# Altium PCB Banker_EDGE_2_SMA.PCBDOC
Units mm, origin at the board's own origin, x right, y up, seen from the top; angles counter-clockwise.
Board outline 21.4 x 72.8 mm, 2 copper layers (Top, Bot), stack 1.571 mm thick; 22 components, 25 nets, 96 pads, 71 vias.
Unrouted connection lines stored in the file: 1.
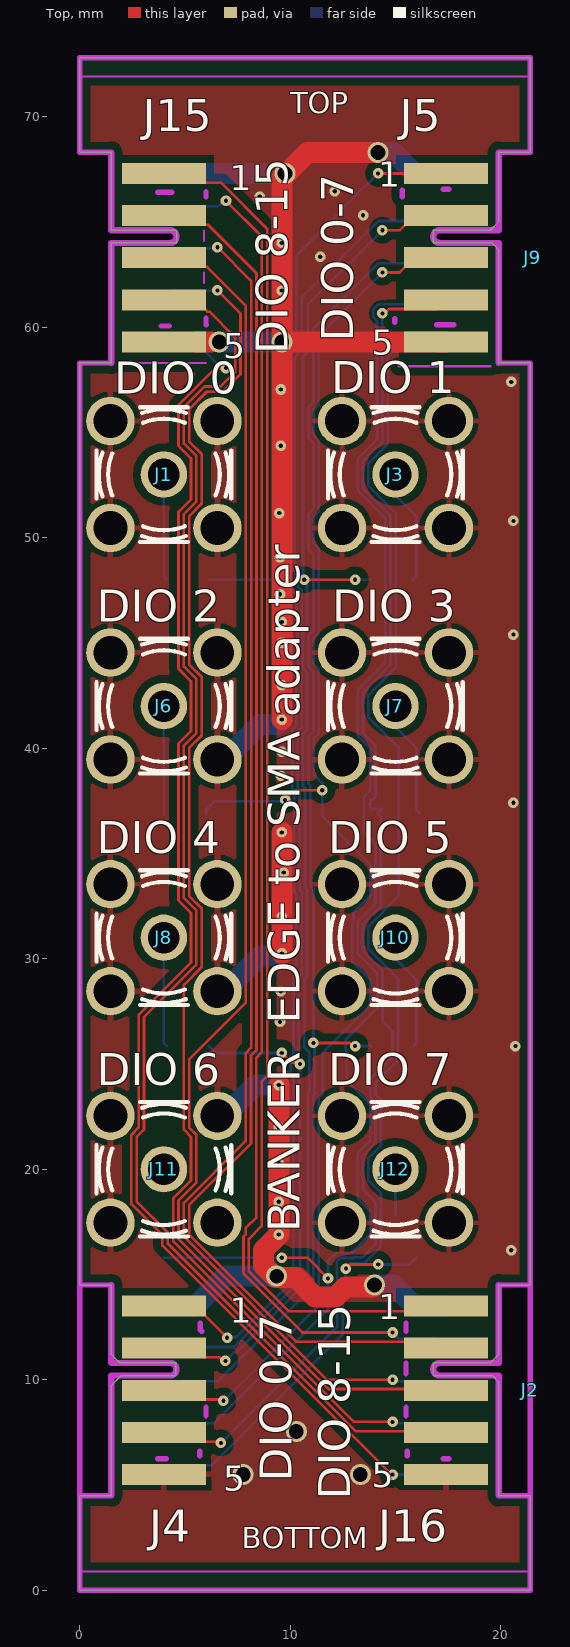
[diagram p0: Top view]
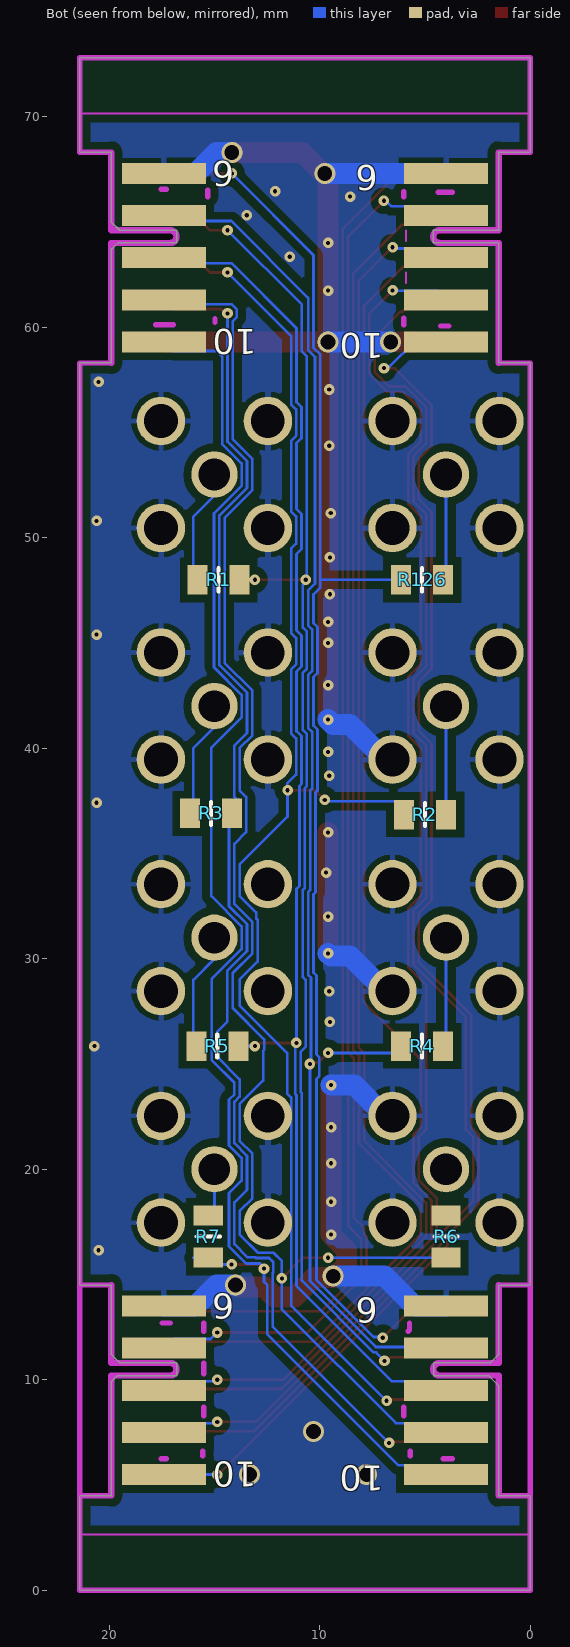
[diagram p1: Bot view, seen from below]
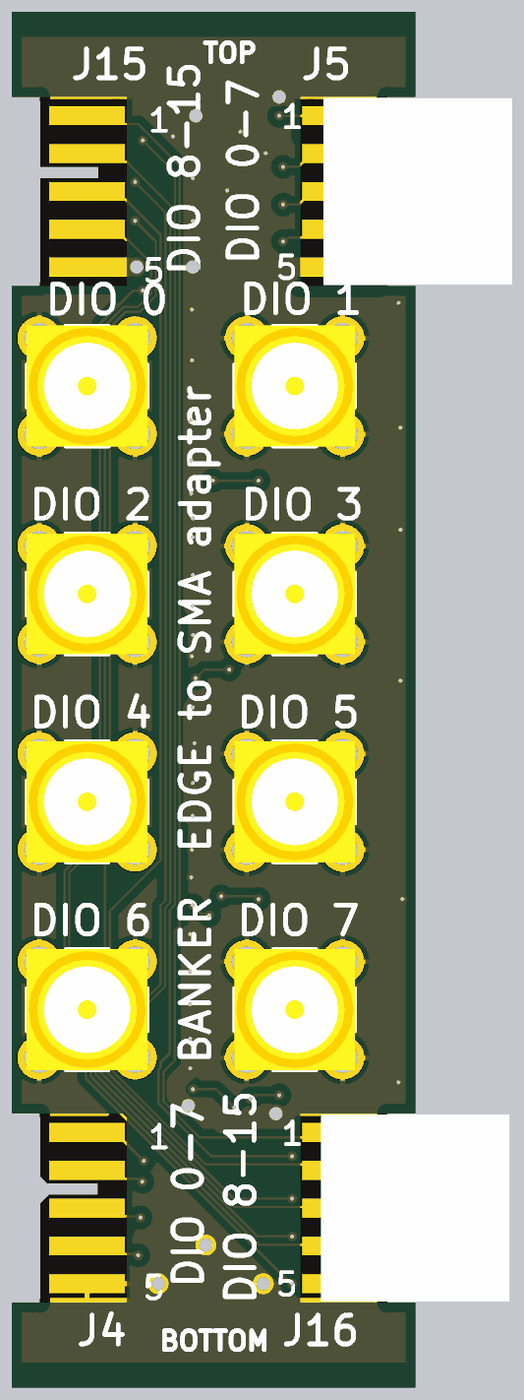
[diagram p2: 3D render of the assembled board from above, using the file's embedded part models]
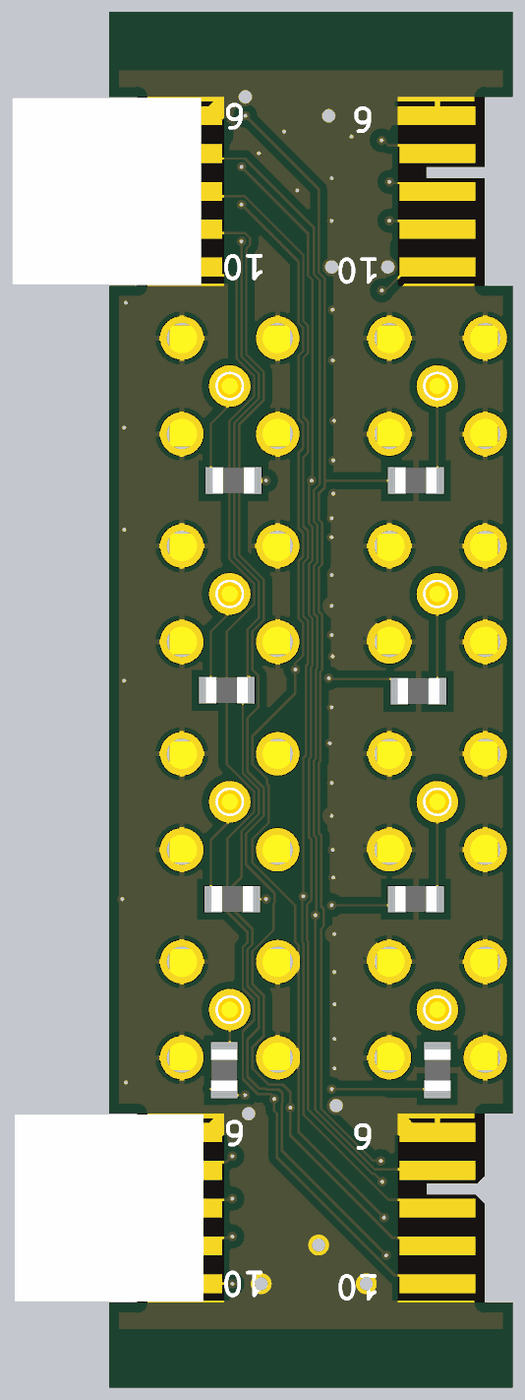
[diagram p3: 3D render of the assembled board from below, using the file's embedded part models]

## Layer stack, top to bottom
TopSolder: solder mask 0.0102, Solder Resist, Dk 3.5
Top: signal copper 0.0356
Dielectric1: core 1.5, FR-4, Dk 4.8
Bot: signal copper 0.0356
BottomSolder: solder mask 0.0102, Solder Resist, Dk 3.5

## Board outline
0,0 0,4.5 1.5,4.5 1.5,9.725 1.975,10.2 4.572,10.2 4.572,10.8 1.9,10.8 1.5,11.2 1.5,14.5 0,14.5 0,58.3 1.5,58.3 1.5,64 4.6,64 4.6,64.6 1.5,64.6 1.5,68.3 0,68.3 0,72.8 21.4,72.8 21.4,68.3 19.9,68.3 19.9,65 19.5,64.6 16.8,64.6 16.8,64 19.6,64 19.8,63.8 19.9,63.7 19.9,58.3 21.4,58.3 21.4,14.5 19.9,14.5 19.9,11.2 19.5,10.8 16.8,10.8 16.8,10.2 19.6,10.2 19.9,9.9 19.9,4.5 21.4,4.5 21.4,0

## Design rules (kind name [scope] priority, off if disabled: settings)
Clearance Clearance_DIFF [(InDifferentialPairClass('All Differential Pairs'))] p1: gap=0.127 ignorepadtopadclearanceinfootprint=FALSE except(0: Arc-Hole Track-Hole SMDPad-Hole THPad-Hole Via-Hole Fill-Hole Poly-Hole Region-Hole Text-Hole; 0.254: Arc-Poly Track-Poly SMDPad-Poly THPad-Poly Via-Poly Fill-Poly Poly-Poly Poly-Region Poly-Text)
Clearance [All] p2: gap=0.127 ignorepadtopadclearanceinfootprint=FALSE except(0: Arc-Hole Track-Hole SMDPad-Hole THPad-Hole Via-Hole Fill-Hole Poly-Hole Region-Hole Text-Hole; 0.381: Arc-Poly Track-Poly SMDPad-Poly THPad-Poly Via-Poly Fill-Poly Poly-Poly)
DiffPairsRouting [All] p1: maxlimit=0.254 minlimit=0.127 mostfreqgap=0.127 toplayer_minwidth=0.127 toplayer_maxwidth=0.381 toplayer_prefwidth=0.254 bottomlayer_minwidth=0.127 bottomlayer_maxwidth=0.381 bottomlayer_prefwidth=0.254 maxuncoupledlength=12.7
FabricationTestPointUsage TestPointUsage [All] p1: valid=0 allowmultiple=FALSE
FabricationTestpoint Testpoint [All] p1: side=3 testpointundercomponent=TRUE minsize=1.016 maxsize=2.54 preferedsize=1.524 minholesize=0.508 maxholesize=1.016 preferedholesize=0.813 testpointgrid=0.025 allowsidetop=TRUE allowsidebottom=TRUE usegrid=TRUE gridtolerance=0
HoleSize [All] p1: absolutevalues=TRUE maxlimit=3.81 minlimit=0.025 maxpercent=80.000 minpercent=20.000
HoleToHoleClearance [All] p1: gap=0.025 allowstackedmicrovias=TRUE
MinimumSolderMaskSliver [All] p1: minsoldermaskwidth=0
PlaneClearance [All] p1: clearance=0.254
PlaneConnect [All] p1: planeconnectstyle=Direct reliefexpansion=0.508 reliefentries=4 reliefconductorwidth=0.254 reliefairgap=0.254
PolygonConnect PolygonConnect_pad [(InPadClass('All Pads'))] p1: connectstyle=Relief reliefconductorwidth=0.254 reliefentries=4 polygonreliefangle="90 Angle" airgapwidth=0.254
PolygonConnect [All] p2: connectstyle=Direct reliefconductorwidth=0.254 reliefentries=4 polygonreliefangle="45 Angle" airgapwidth=0.254
RoomDefinition Banker_EDGE_2_SMA [InComponentClass('Banker_EDGE_2_SMA')] p1 off: confinementstyle=ConfineIn formatcopy=TRUE lockcomponents=FALSE outline 65.65,12.65 248.399,12.65 248.399,36.4 65.65,36.4
RoutingVias [All] p1: holewidth=0.2 width=0.5 viastyle="Through Hole" minholewidth=0.2 minwidth=0.5 maxholewidth=0.8 maxwidth=1.3
SilkToSilkClearance [All] p1: silktosilkclearance=0
SilkToSolderMaskClearance SilkscreenOverComponentPads [IsPad] p1: minsilkscreentomaskgap=0 clearancetoexposedcopper=TRUE
SolderMaskExpansion [All] p1: expansion=0.051
Width [All] p1: maxlimit=1.27 minlimit=0.127 preferedwidth=0.127
20 further rules are at their usual default settings.

## Components (designator, comment, footprint, x,y, rotation, side; value= is the part's Value field where it differs from the comment)
J1 "SMA" Adam_TechRF2-19A-T-00-50-G 4,53 r0 top
J2 "=Family" "AVX_00 9159 010 061 916" 21.4,9.5 r0 top
J3 "SMA" Adam_TechRF2-19A-T-00-50-G 15,53 r0 top
J4 "=Family" EDGE10T1B6_P200W1000L0F100X400 4,13.5 r270 top
J5 "=Family" EDGE10T5B10_P200W1000L0F100X400 17.4,59.3 r90 top
J6 "SMA" Adam_TechRF2-19A-T-00-50-G 4,42 r0 top
J7 "SMA" Adam_TechRF2-19A-T-00-50-G 15,42 r0 top
J8 "SMA" Adam_TechRF2-19A-T-00-50-G 4,31 r0 top
J9 "=Family" "AVX_00 9159 010 061 916" 21.527,63.3 r0 top
J10 "SMA" Adam_TechRF2-19A-T-00-50-G 15,31 r0 top
J11 "SMA" Adam_TechRF2-19A-T-00-50-G 4,20 r0 top
J12 "SMA" Adam_TechRF2-19A-T-00-50-G 15,20 r0 top
J15 "=Family" EDGE10T1B6_P200W1000L0F100X400 4,67.3 r270 top
J16 "=Family" EDGE10T5B10_P200W1000L0F100X400 17.4,5.5 r90 top
R1 "39" RESC2012X60N 14.8,48 r0 bottom
R2 "39" RESC2012X60N 5,36.85 r180 bottom
R3 "39" RESC2012X60N 15.158,36.9 r0 bottom
R4 "39" RESC2012X60N 5.138,25.854 r180 bottom
R5 "39" RESC2012X60N 14.863,25.854 r0 bottom
R6 "39" RESC2012X60N 4,16.8 r90 bottom
R7 "39" RESC2012X60N 15.29,16.8 r90 bottom
R126 "39" RESC2012X60N 5.138,48 r180 bottom

## Footprints (in the part's own frame and the unit in brackets; to place one, negate y for a bottom-side part, rotate by r counter-clockwise, add the part's x,y. Pads: shape width x height; smd on the part's side, far side on the other; paste and mask are expansions set on the pad)
Adam_TechRF2-19A-T-00-50-G [mm] "50 Ohm SMA Straight PCB Jack"
  round 2.2 hole 1.5: 1(0,0)
  round 2.3 hole 1.6: 2(-2.54,-2.54) 2(-2.54,2.54) 2(2.54,-2.54) 2(2.54,2.54)
  silkscreen extent -3.2,-3.2 3.2,3.2, body extent -3.2,-3.2 3.2,3.2, height 9.5
"AVX_00 9159 010 061 916" [mm] "10 Contacts, 2mm Pitch, Open Ended Card Edge Connector, 9159 Series"
  body extent -5,-4.95 5,4.95, height 1.7
EDGE10T1B6_P200W1000L0F100X400 [mm] "10 contacts Board Edge Connector, First Left Top Pad 1, First Left Bottom Pad 2, Pitch 2mm, Length 0mm, Width 10mm, Finger Lenght 4mm, Finger Width 1mm"
  rect 1x4 smd paste-0.5: 1(0,0) 2(2,0) 3(4,0) 4(6,0) 5(8,0)
  rect 1x4 smd far side paste-0.5: 6(0,0) 7(2,0) 8(4,0) 9(6,0) 10(8,0)
  KeepOutLayer lines w0.3: 9,-2.5 3.3,-2.5 3.3,0.3 ccw(c3,0.3) 2.7,0.3 2.7,-2.5 -1,-2.5
EDGE10T5B10_P200W1000L0F100X400 [mm] "10 contacts Board Edge Connector, First Left Top Pad 5, First Left Bottom Pad 10, Pitch 2mm, Length 0mm, Width 10mm, Finger Lenght 4mm, Finger Width 1mm"
  rect 1x4 smd paste-0.5: 1(8,0) 2(6,0) 3(4,0) 4(2,0) 5(0,0)
  rect 1x4 smd far side paste-0.5: 6(8,0) 7(6,0) 8(4,0) 9(2,0) 10(0,0)
  KeepOutLayer lines w0.3: -1,-2.5 4.7,-2.5 4.7,0.3 cw(c5,0.3) 5.3,0.3 5.3,-2.5 9,-2.5
RESC2012X60N [mm] "Chip Resistor, EIA 0805, Metric 2012, Body 2.0x1.2mm, IPC Medium Density"
  rect 0.95x1.4 smd: 1(-1,0) 2(1,0)
  silkscreen extent 0,-0.55 0,0.55, body extent -1.1,-0.67 1.1,0.68, height 0.6

## Part data
J1 J3 J6 J7 J8 J10 J11 J12: "SMA 50 Ohms Straight PCB Jack", Manufacturer="Adam Tech", Manufacturer Part Number=RF2-19A-T-00-50-G, Author=GK, ComponentHeight=9.6mm, Component Type=Standard, CreateDate=20/04/2010, Family=SMA, HelpURL=\\cern.ch\dfs\Applications\Altium\Datasheets\HUBER-SUHNER_82_SMA-50-0-41-133_NE.pdf, LatestRevisionDate=06/11/2014, Mounted=Yes, Part Description="SMA 50 Ohms Straight PCB Jack", Part Number=RF2-19A-T-00-50-G, Pin Count=2, PressFit=No, Sense=No, SMD=No, Socket=No, Status=None
J2 J9: library part "AVX_00 9159 010 061 916", "Open Ended Card Edge Connector, 9159 Series", Manufacturer=AVX, Manufacturer Part Number="00 9159 010 061 916", Author="CERN DEM MR", ComponentHeight=1.6mm, Component Type=Standard, CreateDate=13.02.2018, HelpURL="\\cern.ch\dfs\Applications\Altium\Datasheets\AVX_00 9159 010 061 916.pdf", LatestRevisionDate=13.02.2018, Mounted=Yes, Part Description="10 Contacts, 2mm Pitch, Open Ended Card Edge Connector, 9159 Series", Part Number="AVX_00 9159 010 061 916", Pin Count=10, PressFit=No, Sense=No, SMD=No, Socket=No, Status=None
J4 J15: library part EDGE10T1B6_P200W1000L0F100X400, "PCB Edge Connector 10 (2x5)", Author="CERN DEM MR", ComponentHeight=0mm, Component Type="Standard (No BOM)", CreateDate=14.02.2018, HelpURL=\\cern.ch\dfs\Applications\Altium\Datasheets\EDGE10T1B6_P200W1000L0F100X400.pdf, LatestRevisionDate=14.02.2018, Mounted=No, Part Description="10 Contacts Board Edge Connector, Pitch 2mm, Length 0mm, Width 10mm, Finger Lenght 4mm, Finger Width 1mm", Part Number=EDGE10T1B6_P200W1000L0F100X400, Pin Count=10, PressFit=No, Sense=No, SMD=No, Socket=No, Status=None
J5 J16: library part EDGE10T5B10_P200W1000L0F100X400, "PCB Edge Connector 10 (2x5)", Author="CERN DEM MR", ComponentHeight=0mm, Component Type="Standard (No BOM)", CreateDate=14.02.2018, HelpURL=\\cern.ch\dfs\Applications\Altium\Datasheets\EDGE10T5B10_P200W1000L0F100X400.pdf, LatestRevisionDate=14.02.2018, Mounted=No, Part Description="10 Contacts Board Edge Connector, Pitch 2mm, Length 0mm, Width 10mm, Finger Lenght 4mm, Finger Width 1mm", Part Number=EDGE10T5B10_P200W1000L0F100X400, Pin Count=10, PressFit=No, Sense=No, SMD=No, Socket=No, Status=None
R1 R2 R3 R4 R5 R6 R7 R126: library part R0805_39R_1%_0.125W_100PPM, "Resistor - 1%", Case=0805, Manufacturer=GENERIC, Manufacturer1 ComponentHeight=0.6mm, Manufacturer1 Example="NIC COMPONENT", Manufacturer1 Part Number=NRC10F39R0TRF, Power=0.125W, Tolerance=±1%, Author="CERN DEM JLC", Component Type=Standard, CreateDate=03/12/2007, HelpURL=\\cern.ch\dfs\Applications\Altium\Datasheets\R0805_NIC_NRC.pdf, LatestRevisionDate=13/03/2008, Manufacturer Part Number=R0805_39R_1%_0.125W_100PPM, Mounted=Yes, Part Description="General Purpose Thick Film Chip Resistor", Part Number=R0805_39R_1%_0.125W_100PPM, Pin Count=2, PressFit=No, Sense=No, SMD=Yes, Socket=No, Status=Preferred, TC=±100ppm/°C

## Via types
v1: diameter 0.5, hole 0.2, Top to Bot, tented both sides, 62 vias
v2: diameter 1, hole 0.7, Top to Bot, tented both sides, 6 vias
v3: diameter 1, hole 0.7, Top to Bot, 3 vias

## Nets (pads, with @x,y where several pads share a name; then routed paths per layer and width w, separated by ;. In a path a pad name is that pad's centre, name@x,y a point inside that pad or via, vN(x,y) a via of type N, cw(c..) or ccw(c..) an arc to the next point about the centre after c; other vN are vias at no path point)
EDGE0_DIO0: J4.1 J5.1 R126.1 | length 69.9
  Top w0.127: J4.1 5.5,13.5 v1(7,12) ; v1(14.175,67.3) J5.1
  Bot w0.127: R126.1 9.969,48 ; v1(7,12) 7.028,12.028 7.441,12.028 10.148,14.736 10.148,24.286 10.022,24.413 10.022,25.324 10.155,25.458 10.155,29.204 10.291,29.34 10.291,33.056 10.197,33.15 10.197,37.891 10.104,37.984 10.104,40.887 10.291,41.074 10.291,43.377 10.104,43.564 10.104,45.754 10.291,45.941 10.291,47.312 9.969,47.634 9.969,48 ; v1(14.175,67.3) 10.291,63.416 10.291,59.014 9.969,58.692 9.969,48
EDGE0_DIO1: J4.2 J5.2 R1.1 | length 67.1
  Top w0.127: J4.2 5.5,11.5 5.937,11.064 6.655,11.064 6.82,10.898 v1(6.921,10.898) ; v1(10.663,48) v1(13.079,48) ; v1(14.379,64.6) 15.2,64.6 15.9,65.3 J5.2
  Bot w0.127: v1(6.921,10.898) 7.328,11.306 7.436,11.306 10.846,14.715 10.846,23.618 10.903,23.674 10.903,25.578 10.663,25.818 10.663,28.994 10.799,29.129 10.799,33.266 10.705,33.36 10.705,38.101 10.612,38.195 10.612,40.677 10.799,40.864 10.799,43.587 10.612,43.774 10.612,45.544 10.799,45.731 10.799,47.764 10.612,47.951 10.612,58.617 10.85,58.855 10.85,61.071 v1(14.379,64.6) ; v1(13.079,48) R1.1
EDGE0_DIO2: J4.3 J5.3 R2.1 | length 72.7
  Top w0.127: J4.3 4.437,9.064 6.761,9.064 v1(6.825,9) ; v1(9.756,37.542) 10.215,38 v1(11.525,38) ; v1(14.379,62.6) 15.2,62.6 15.9,63.3 J5.3
  Bot w0.127: R2.1 6,37.075 6.412,37.486 9.701,37.486 v1(9.756,37.542) ; v1(6.825,9) 11.354,13.529 11.354,23.407 11.544,23.597 11.544,25.529 13.801,27.786 13.801,29.015 12.948,29.868 12.948,31.85 13.009,31.912 13.009,32.199 13.015,32.199 13.801,32.985 13.801,34.473 11.525,36.749 v1(11.525,38) ; v1@11.544,38 11.544,38.327 11.12,38.752 11.12,40.466 11.358,40.704 11.358,43.747 11.12,43.985 11.12,45.244 11.358,45.482 11.358,49.479 11.12,49.717 11.12,51.015 11.358,51.253 11.358,54.598 11.12,54.836 11.12,56.095 11.358,56.333 11.358,59.579 v1(14.379,62.6)
EDGE0_DIO3: J4.4 J5.4 R3.1 | length 68.1
  Top w0.127: J4.4 4.437,7.064 6.642,7.064 v1(6.706,7) ; v1(14.379,60.654) 14.48,60.654 14.689,60.863 16.963,60.863 J5.4
  Bot w0.127: v1(6.706,7) 12.235,12.529 12.235,15.068 12.205,15.098 12.205,15.588 12.398,15.781 13.036,15.781 13.069,15.814 13.428,15.814 14.055,16.44 14.055,18.427 13.456,19.026 13.456,20.64 14.055,21.239 14.055,23.2 13.801,23.454 13.801,24.266 14.863,25.328 14.863,26.533 14.383,27.013 14.383,29.433 13.456,30.36 13.456,31.64 14.309,32.493 14.309,36.749 R3.1 14.379,37.121 13.801,37.121 13.801,37.536 13.906,37.536 14.055,37.685 14.055,40.12 13.456,40.719 13.456,42.64 14.766,43.95 14.766,51.05 13.456,52.36 13.456,53.64 14.379,54.563 v1(14.379,60.654)
EDGE0_DIO4: J4.7 J5.7 R4.1 | length 68.3
  Top w0.127: v1(9.6,25.526) 10.054,25.071 10.391,25.071 v1(10.462,25)
  Bot w0.127: J4.7 4.059,11.56 7.331,11.56 10.462,14.691 10.462,24.947 10.409,25 10.409,29.099 10.545,29.235 10.545,33.161 10.451,33.255 10.451,37.996 10.358,38.09 10.358,40.782 10.545,40.969 10.545,43.482 10.358,43.669 10.358,45.649 10.545,45.836 10.545,47.496 10.223,47.818 10.223,58.587 10.545,58.909 10.545,61.389 14.196,65.041 17.141,65.041 J5.7 ; R4.1 6.465,25.526 v1(9.6,25.526)
EDGE0_DIO5: J4.8 J5.8 R5.1 | length 66
  Top w0.127: v1(11.104,26) 12.832,26 12.978,25.854 v1(13.079,25.854)
  Bot w0.127: J4.8 5.5,9.5 5.937,9.937 6.582,9.937 11.1,14.454 11.1,23.513 11.157,23.569 11.157,25.947 v1(11.104,26) 11.104,33.321 10.959,33.465 10.959,38.207 10.866,38.3 10.866,40.572 11.104,40.81 11.104,43.642 10.866,43.88 10.866,45.349 11.104,45.587 11.104,49.225 10.866,49.463 10.866,51.12 11.104,51.358 11.104,54.493 10.866,54.731 10.866,56.2 11.104,56.438 11.104,59.948 14.196,63.041 17.141,63.041 J5.8 ; v1(13.079,25.854) R5.1
EDGE0_DIO6: J4.9 J5.9 R6.1 | length 75.3
  Top w0.127: v1(9.6,15.8) 10.813,15.8 v1(11.795,14.818)
  Bot w0.127: J4.9 4.437,7.937 6.384,7.937 11.795,13.347 v1(11.795,14.818) 11.795,15.643 12.186,16.035 12.931,16.035 13.801,16.905 13.801,18.015 13.202,18.614 13.202,20.745 13.801,21.344 13.801,23.095 12.687,24.209 12.687,25.623 12.638,25.671 12.638,26.165 14.129,27.656 14.129,29.328 13.202,30.255 13.202,31.745 14.055,32.598 14.055,35.447 13.492,36.009 13.492,37.679 13.801,37.987 13.801,40.015 13.202,40.614 13.202,42.745 14.512,44.055 14.512,50.945 13.202,52.255 13.202,53.745 14.125,54.668 14.125,60.285 13.938,60.472 13.938,60.836 14.196,61.095 17.195,61.095 J5.9 ; R6.1 v1(9.6,15.8)
EDGE0_DIO7: J4.10 J5.10 R7.1 | length 69.7
  Top w0.127: v1(12.646,15.28) 12.843,15.477 v1(14.183,15.477)
  Bot w0.127: J4.10 4.437,5.937 6.265,5.937 12.489,12.16 12.489,14.5 12.646,14.657 v1(12.646,15.28) ; v1@12.646,15.356 12.646,15.348 12.825,15.527 13.501,15.527 14.309,16.335 14.309,18.866 13.71,19.465 13.71,20.535 14.309,21.134 14.309,23.306 14.055,23.56 14.055,24.109 15.121,25.175 15.121,29.054 13.71,30.465 13.71,31.535 15.148,32.973 15.148,40.027 13.71,41.465 13.71,42.535 15.02,43.845 15.02,51.155 13.71,52.465 13.71,53.535 14.633,54.458 14.633,58.609 14.888,58.863 16.963,58.863 J5.10 ; v1(14.183,15.477) 15.677,15.477 16,15.8
EDGE1_DIO0: J15.1 J16.1 | length 66.1
  Top w0.127: J15.1 4.437,66.863 6.709,66.863 8.91,64.663 8.91,64.4 8.91,24.428 8.642,24.161 8.642,17.308 8.033,16.698 8.033,15.151 9.933,13.251 17.151,13.251 J16.1
EDGE1_DIO1: J15.2 J16.2 | length 67
  Top w0.127: J15.2 5.5,65.3 5.937,64.863 6.099,64.863 8.402,62.561 8.402,25.669 8.134,25.402 8.134,21.232 5.199,18.297 5.199,16.905 10.299,11.806 17.094,11.806 J16.2
EDGE1_DIO2: J15.3 J16.3 | length 66.5
  Top w0.127: J15.3 4.437,62.863 6.045,62.863 7.894,61.015 7.894,27.918 5.199,25.224 5.199,21.985 5.544,21.64 5.544,19.36 4.691,18.507 4.691,16.694 11.826,9.56 17.34,9.56 J16.3
EDGE1_DIO3: J15.4 J16.4 | length 68.6
  Top w0.127: J15.4 5.5,61.3 6.064,60.736 6.167,60.736 7.386,59.518 7.386,57.873 6.698,57.185 5.93,57.185 4.945,56.2 4.945,54.47 5.544,53.871 5.544,51.719 4.945,51.12 4.945,43.88 5.544,43.281 5.544,40.719 4.945,40.12 4.945,32.88 5.544,32.281 5.544,29.719 3.054,27.229 3.054,21.88 2.709,21.535 2.709,18.465 4.183,16.991 4.183,16.484 13.108,7.559 17.341,7.559 J16.4
EDGE1_DIO4: J15.7 J16.7 | length 66.4
  Top w0.127: v1(6.95,66) 8.656,64.294 8.656,25.563 8.388,25.296 8.388,17.707 7.88,17.199 7.88,16.905 7.779,16.803 7.779,15.046 10.578,12.246 v1(14.862,12.246)
  Bot w0.127: J15.7 4.437,65.736 6.591,65.736 6.854,66 v1(6.95,66) ; v1(14.862,12.246) 14.866,12.246 15.176,11.937 16.964,11.937 J16.7
EDGE1_DIO5: J15.8 J16.8 | length 67.2
  Top w0.127: v1(6.54,63.8) 8.148,62.192 8.148,25.774 7.88,25.507 7.88,21.337 4.945,18.402 4.945,16.8 11.745,10 v1(14.862,10)
  Bot w0.127: J15.8 5.5,63.3 5.937,63.736 6.477,63.736 v1(6.54,63.8) ; v1(14.862,10) 14.926,9.936 15.464,9.936 15.9,9.5 J16.8
EDGE1_DIO6: J15.9 J16.9 | length 68.6
  Top w0.127: v1(6.54,61.746) 7.64,60.646 7.64,57.767 6.803,56.931 6.036,56.931 5.199,56.095 5.199,54.575 5.798,53.976 5.798,51.614 5.199,51.015 5.199,43.985 5.798,43.386 5.798,40.614 5.199,40.015 5.199,32.985 5.798,32.386 5.798,29.614 4.945,28.761 4.945,21.88 5.29,21.535 5.29,19.465 4.437,18.612 4.437,16.589 13.027,8 v1(14.862,8)
  Bot w0.127: J15.9 4.437,61.736 6.53,61.736 v1(6.54,61.746) ; v1(14.862,8) 14.926,7.936 16.964,7.936 J16.9
EDGE1_DIO7: J15.10 J16.10 | length 67.4
  Top w0.127: v1(6.945,58.055) 6.441,58.055 4.691,56.306 4.691,54.365 5.29,53.766 5.29,51.825 4.691,51.226 4.691,43.774 5.29,43.175 5.29,40.825 4.691,40.226 4.691,32.774 5.29,32.175 5.29,29.825 2.8,27.335 2.8,21.985 2.455,21.64 2.455,18.36 3.929,16.886 3.929,16.379 14.808,5.5 v1(14.862,5.5)
  Bot w0.127: J15.10 5.5,59.3 6.674,58.126 6.874,58.126 v1(6.945,58.055) ; v1(14.862,5.5) J16.10
GND: J1.2 J3.2 J4.5 J4.6 J5.5 J5.6 J6.2 J7.2 J8.2 J10.2 J11.2 J12.2 J15.5 J15.6 J16.5 J16.6 | length 91.9
  Top w1: J15.5@5.5,59.3 v2@6.225,59.3 ; v1(9.458,24) v1(9.458,16.898) 8.723,16.163 8.723,15.437 9.298,14.862 10.267,14.862 11.188,13.941 12.158,13.941 12.62,14.403 13.903,14.403 v2(14,14.5) ; v1(9.6,30.255) v1(9.6,36) ; v1(9.6,41.36) v2(9.6,59.3) ; v2(14.175,68.3) 10.822,68.3 9.6,67.078 v2(9.6,59.3) ; J5.5 v2(9.6,59.3)
  Bot w1: J4.6 5.5,13.5 6.923,14.923 v2(9.359,14.923) ; J15.6 v2(9.756,67.3) ; J11.2@6.54,22.54 6.892,22.54 8.352,24 v1(9.458,24) ; J8.2@6.54,28.46 6.892,28.46 8.555,30.123 9.468,30.123 v1(9.6,30.255) ; J6.2@6.54,39.46 6.892,39.46 8.555,41.123 9.363,41.123 v1(9.6,41.36) ; v2(6.627,59.3) v2(9.6,59.3) ; v2(14,14.5) 14.9,14.5 15.9,13.5 J16.6 ; v2(14.175,68.3) 14.9,68.3 J5.6@15.9,67.3
  other v1: 20.5,16.154 9.458,18.461 9.458,20.29 9.458,22 20.7,25.854 9.515,27 9.55,28.46 9.6,32 9.695,34.095 20.6,37.413 9.55,38.694 9.6,39.827 9.6,43 9.604,45 20.6,45.4 9.6,46 9.515,47.312 9.515,49.061 20.6,50.799 9.475,51.168 9.55,54.364 9.55,57.039 20.5,57.4 9.6,61.736 11.424,63.345 9.6,64 13.46,65.318 8.555,66.2 12.12,66.455
  other v3: 7.766,5.5 13.333,5.5 10.291,7.545
NetJ1_1: J1.1 R126.2 | length 5.1
  Bot w0.127: J1.1 4,48.138 R126.2
NetJ3_1: J3.1 R1.2 | length 5.5
  Bot w0.127: J3.1 15,52 16,51 16,48.2 R1.2
NetJ6_1: J6.1 R2.2 | length 5.2
  Bot w0.127: R2.2 J6.1
NetJ7_1: J7.1 R3.2 | length 5.6
  Bot w0.127: J7.1 15,41 16,40 16,37.058 R3.2
NetJ8_1: J8.1 R4.2 | length 5.2
  Bot w0.127: J8.1 4,25.991 R4.2
NetJ10_1: J10.1 R5.2 | length 5.6
  Bot w0.127: J10.1 15,30 16,29 16,25.991 R5.2
NetJ11_1: J11.1 R6.2
NetJ12_1: J12.1 R7.2 | length 2.2
  Bot w0.127: J12.1 15,17.827 R7.2@15.027,17.8

## Polygon pours and split planes (outlines as drawn)
GND on Top "Top-GND" (solid, remove dead copper, pour order 4): 0,72.8 21.4,72.8 21.4,1 21.3,0.9 0,0.9
GND on Bot "Bot-GND" (solid, remove dead copper, pour order 6): 0,70.15 21.4,70.15 21.4,2.65 0,2.65

## Keep-outs
Top:
  lines w0.1: 0,0.9 21.3,0.9 ; 0,71.9 21.4,71.9 ; 1.912,58.3 6.008,58.3 ; 15.158,58.142 19.519,58.142
Bot:
  lines w0.1: 0,2.65 21.4,2.65 ; 0,70.15 21.4,70.15
  lines w0.254: 17.1,12.7 17.481,12.7
KeepOutLayer:
  lines w0.1: 5.9,62.1 5.9,62.6 ; 5.9,64.1 5.9,64.6
  lines w0.254: 0,0.35 0,0 ; 0,14.5 1.5,14.5 ; 0.1,4.5 1.5,4.5 ; 1.5,58.3 0,58.3 0,43.8 0,0.15 ; 1.5,68.3 0,68.3 0,72.8 21.4,72.8 21.4,68.3 19.9,68.3 ; 3.704,6.254 4.127,6.254 ; 3.703,66.4 4.375,66.4 ; 3.873,60.054 4.254,60.054 ; 5.7,6.4 5.7,6.619 ; 5.734,12.7 5.734,12.366 5.8,12.3 ; 6,8.3 6,8.7 ; 6,60.419 6,60.108 6.008,60.1 ; 6,66.181 6,66.446 ; 14.974,60.226 14.974,60.41 ; 15.323,66.2 15.323,66.5 ; 15.5,8.3 15.5,8.7 ; 15.5,10.292 15.5,10.8 ; 15.5,12.3 15.5,12.7 ; 15.554,6.4 15.554,6.619 ; 16.963,60.108 17.784,60.108 ; 17.273,6.254 17.527,6.254 ; 17.273,66.546 17.527,66.546 ; 19.9,4.5 21.35,4.5 ; 19.9,14.5 21.3,14.5 ; 19.9,58.3 21.4,58.3 21.4,0 0,0 ; 0,0 0,0.15 ; 0,0.15 0,0.15

## Silkscreen, mask and mechanical layers (free items; w line width, h text height)
TopOverlay:
  text "TOP" at 10,70.15 h1
  text "DIO 0-7" at 13,59.3 h1.52 r90
  text "DIO 8-15" at 9.881,58.725 h1.52 r90
  text "DIO 1" at 11.938,56.871 h1.52
  text "DIO 0" at 1.651,56.845 h1.52
  text "DIO 2" at 0.8,46 h1.52
  text "DIO 3" at 12,46 h1.52
  text "DIO 4" at 0.8,35 h1.52
  text "DIO 5" at 11.8,35 h1.52
  text "DIO 6" at 0.8,24 h1.52
  text "DIO 7" at 11.8,24 h1.52
  text "BANKER  EDGE to SMA adapter" at 10.462,17 h1.52 r90
  text "DIO 0-7" at 10.079,5.15 h1.52 r90
  text "DIO 8-15" at 12.856,4.293 h1.52 r90
  text "BOTTOM" at 7.694,2 h1
Mechanical1:
  lines w0.2: 0,14.5 0,14.5
  lines w0.254: 0,0 0,4.5 1.5,4.5 1.5,9.725 1.975,10.2 4.572,10.2 4.572,10.8 1.9,10.8 1.5,11.2 1.5,14.5 0,14.5 0,58.3 1.5,58.3 1.5,64 4.6,64 4.6,64.6 1.5,64.6 1.5,68.3 0,68.3 0,72.8 21.4,72.8 21.4,68.3 19.9,68.3 19.9,65 19.5,64.6 16.8,64.6 16.8,64 19.6,64 19.8,63.8 19.9,63.7 19.9,58.3 21.4,58.3 21.4,14.5 19.9,14.5 19.9,11.2 19.5,10.8 16.8,10.8 16.8,10.2 19.6,10.2 19.9,9.9 19.9,4.5 21.4,4.5 21.4,0 0,0

## Text inside footprints (layer, text, board x,y; h text height)
J4: TopOverlay "1" at 7.125,12.7 h1.2; TopOverlay "5" at 6.825,4.72 h1.2; BottomOverlay "6" at 7.25,13.9 h1.2 r180; BottomOverlay "10" at 6.95,5.92 h1.2 r180
J5: TopOverlay "5" at 13.875,58.7 h1.2; TopOverlay "1" at 14.175,66.68 h1.2; BottomOverlay "10" at 13,59.9 h1.2 r180; BottomOverlay "6" at 14.05,67.88 h1.2 r180
J15: TopOverlay "1" at 7.125,66.5 h1.2; TopOverlay "5" at 6.825,58.52 h1.2; BottomOverlay "6" at 7.25,67.7 h1.2 r180; BottomOverlay "10" at 6.95,59.72 h1.2 r180
J16: TopOverlay "5" at 13.875,4.9 h1.2; TopOverlay "1" at 14.175,12.88 h1.2; BottomOverlay "10" at 13,6.1 h1.2 r180; BottomOverlay "6" at 14.05,14.08 h1.2 r180